# EAGLE board Panel (EAGLE 9.5.2)
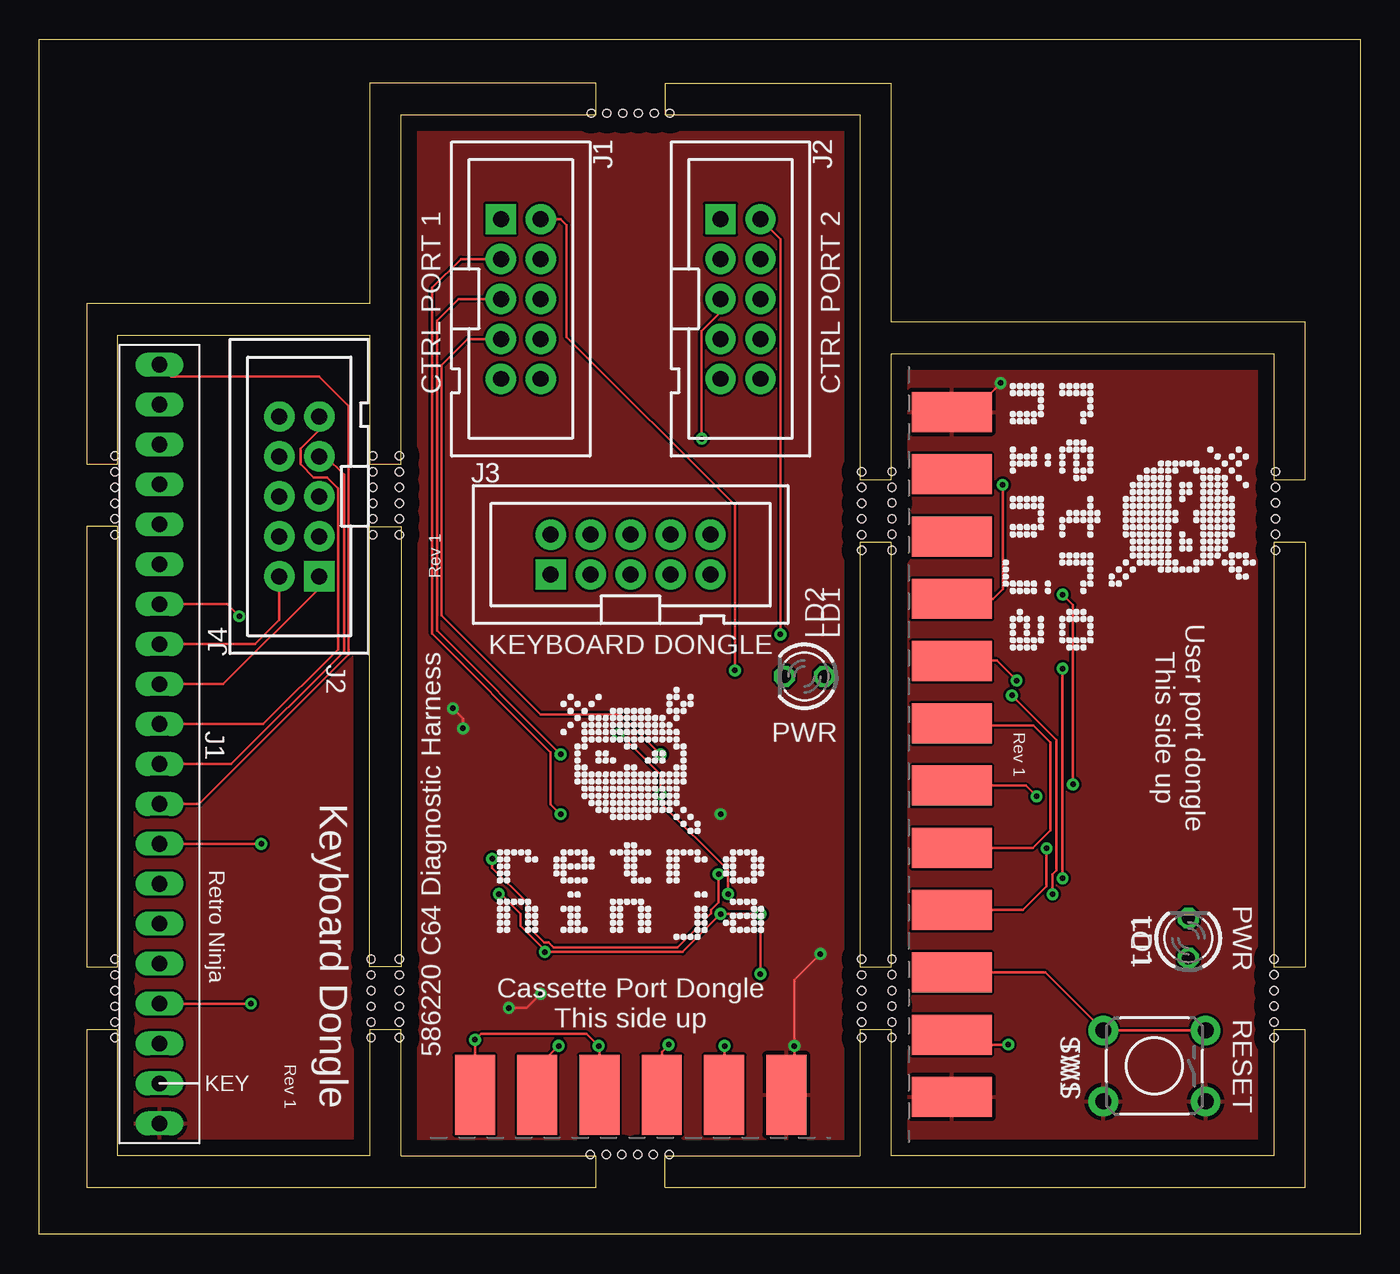
[diagram p0: board, top side]
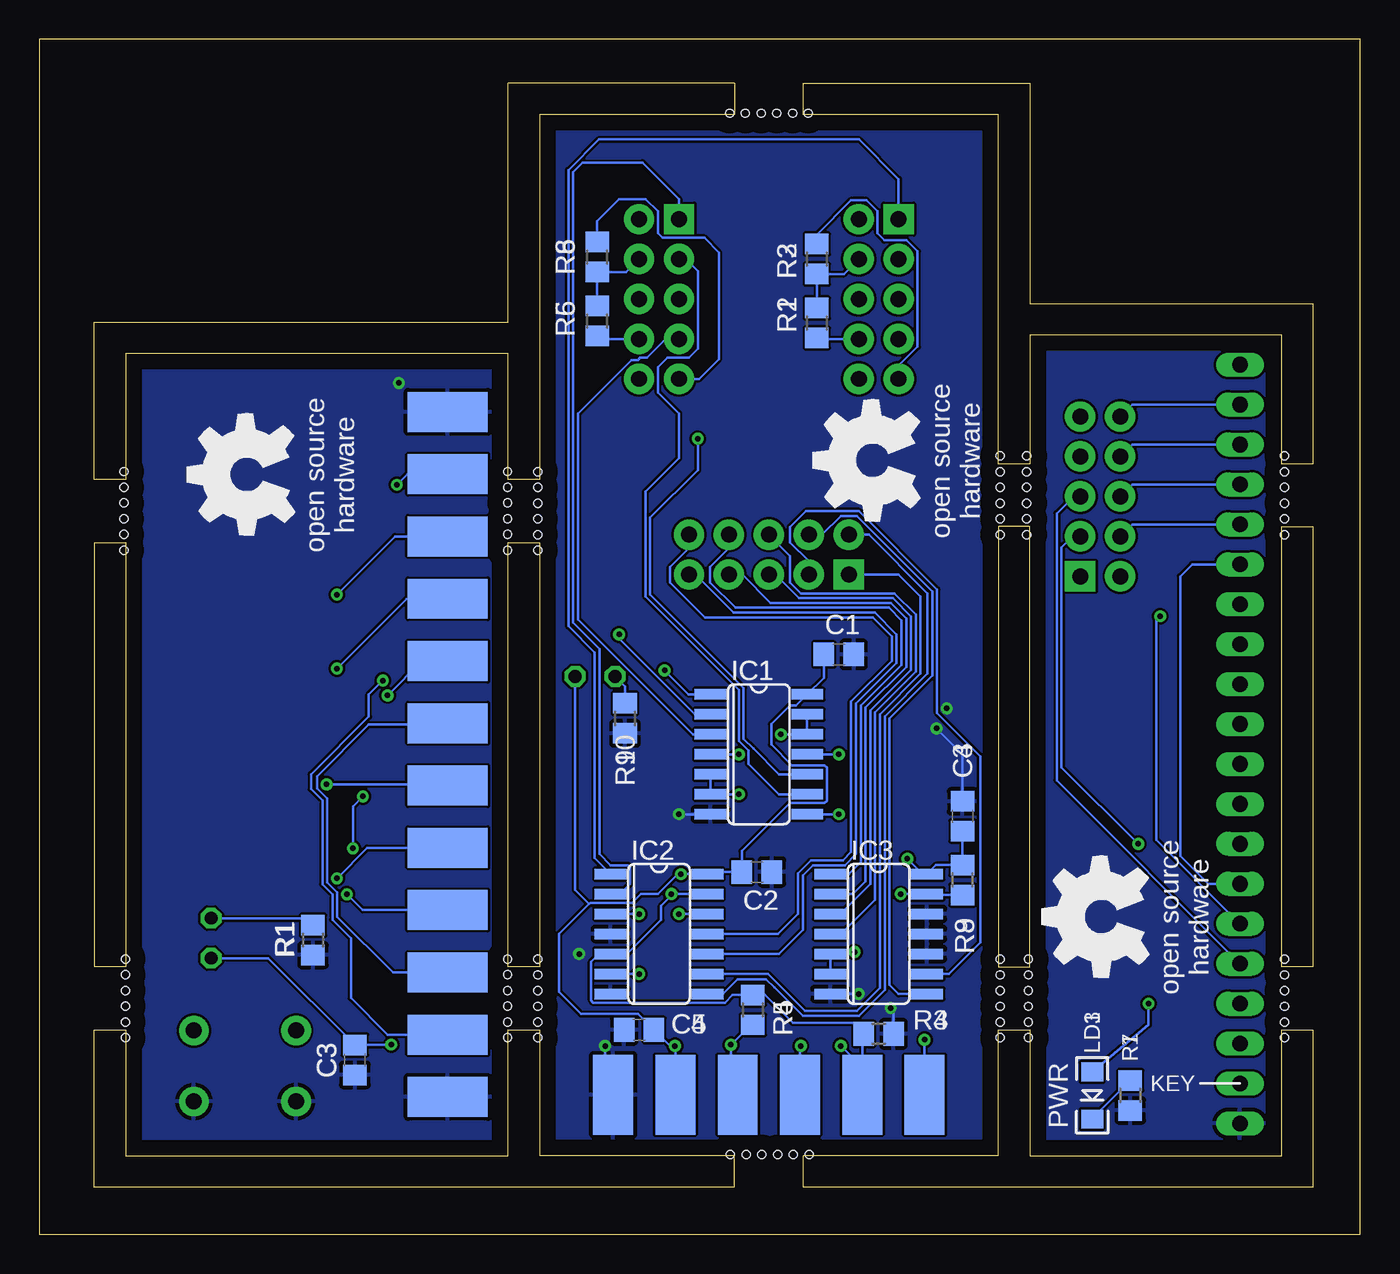
[diagram p1: board, bottom side, seen from below]

Size 84 x 76 mm. Coordinates in mm from the lower left corner, seen from the top.
Outline: 0,0 0,76 84,76 84,0 0,0
Outline: 5,5 5,13 3,13 3,3 35.4,3 35.4,5 23,5 23,13 21,13 21,5 5,5
Outline: 39.8,3 80.5,3 80.5,13 78.5,13 78.5,5 54.2,5 54.2,13 52.2,12.99 52.2,5 39.8,5 39.8,3
Outline: 80.5,44 80.5,17 78.5,17 78.5,44 80.5,44
Outline: 78.5,48 80.5,48 80.5,58.01 54.2,58.01 54.2,73.2 39.8,73.2 39.8,71.2 52.2,71.2 52.2,48 54.2,48 54.2,56 78.5,56 78.5,48
Outline: 52.2,44 52.2,17 54.2,17 54.2,44 52.2,44
Outline: 23,71.2 35.4,71.2 35.4,73.2 21,73.2 21,59.2 3,59.2 3,49 5,49 5,57.2 21,57.2 21,49 23,49 23,71.2
Outline: 21,45 23,45 23,17 21,17 21,45
Outline: 3,17 5,17 5,45 3,45 3,17
Copper layers (1*16): Top 0.035mm / dielectric 0.15mm / Bottom 0.035mm
Design rules "default": minimum track width 6mil, minimum drill 0.35mm, track to track 6mil, track to pad 6mil, pad to pad 6mil, via to via 6mil, smd to smd 6mil, copper to edge 40mil, drill to drill 6mil, minimum pad ring 10mil, minimum via ring 8mil, stop-mask expansion 4mil, vias tented up to drill 0mil, thermal gap 10mil
Holes 0.5 mm at 4.8,47.5 4.8,48.5 4.8,46.5 4.8,45.5 4.8,49.5 4.8,44.5 21.2,47.5 21.2,48.5 21.2,46.5 21.2,45.5 21.2,49.5 21.2,44.5 22.9,47.5 22.9,48.5 22.9,46.5 22.9,45.5 22.9,49.5 22.9,44.5 52.3,46.5 52.3,47.5 52.3,45.5 52.3,44.5 52.3,48.5 52.3,43.5 78.52,14.51 78.52,13.51 78.52,15.51 78.52,16.51 78.52,12.51 78.52,17.51 54.22,14.51 54.22,13.51 54.22,15.51 54.22,16.51 54.22,12.51 54.22,17.51 54.22,45.51 54.22,44.51 54.22,46.51 54.22,47.51 54.22,43.51 54.22,48.51 4.8,15.5 4.8,16.5 4.8,14.5 4.8,13.5 4.8,17.5 4.8,12.5 21.1,15.5 21.1,16.5 21.1,14.5 21.1,13.5 21.1,17.5 21.1,12.5 22.9,15.5 22.9,16.5 22.9,14.5 22.9,13.5 22.9,17.5 22.9,12.5 52.3,15.5 52.3,16.5 52.3,14.5 52.3,13.5 52.3,17.5 52.3,12.5 78.62,45.51 78.62,44.51 78.62,46.51 78.62,47.51 78.62,43.51 78.62,48.51 37.1,71.3 36.1,71.3 38.1,71.3 39.1,71.3 35.1,71.3 40.1,71.3 37.05,5.07 36.05,5.07 38.05,5.07 39.05,5.07 35.05,5.07 40.05,5.07

## Footprints (pad centres in the part's own frame; a part is rotated, then mirrored left to right if it is on the bottom)
C0805 = smd 1.3 x 1.5: 1 -0.95,0; 2 0.95,0
C64_CASSETTE_CONNECTOR = smd 2.54 x 5.08: 1 9.9,2.73; 2 5.94,2.73; 3 1.98,2.73; 4 -1.98,2.73; 5 -5.94,2.73; 6 -9.9,2.73 | smd 2.54 x 5.08 bottom: A 9.9,2.73; B 5.94,2.73; C 1.98,2.73; D -1.98,2.73; E -5.94,2.73; F -9.9,2.73
C64_KEYBOARD_CONNECTOR = drill 1 pad 1.524 long: !RESTORE 0,19.05; +5V 0,16.51; GND 0,24.13; N/C 0,21.59; PA0 0,-6.35; PA1 0,-21.59; PA2 0,-19.05; PA3 0,-16.51; PA4 0,-13.97; PA5 0,-11.43; PA6 0,-8.89; PA7 0,-24.13; PB0 0,-3.81; PB1 0,-1.27; PB2 0,1.27; PB3 0,13.97; PB4 0,6.35; PB5 0,8.89; PB6 0,11.43; PB7 0,3.81
SO14 = smd 0.66 x 2.032: 1 -3.81,-3.073; 2 -2.54,-3.073; 3 -1.27,-3.073; 4 0,-3.073; 5 1.27,-3.073; 6 2.54,-3.073; 7 3.81,-3.073; 8 3.81,3.073; 9 2.54,3.073; 10 1.27,3.073; 11 0,3.073; 12 -1.27,3.073; 13 -2.54,3.073; 14 -3.81,3.073
2X5_HEADER_WALLED = drill 1.016 pad 1.93 square: 1 -5.08,-1.27 | drill 1.016 pad 1.93: 2 -5.08,1.27; 3 -2.54,-1.27; 4 -2.54,1.27; 5 0,-1.27; 6 0,1.27; 7 2.54,-1.27; 8 2.54,1.27; 9 5.08,-1.27; 10 5.08,1.27
LED3MM = drill 0.813 octagon: A -1.27,0; K 1.27,0
LED-1206 = smd 1.2 x 1.4: A -1.5,0; C 1.5,0
R0805 = smd 1.3 x 1.5: 1 -0.95,0; 2 0.95,0
TACTILE-PTH = drill 1.016 pad 1.88: 1 -3.251,2.261; 2 3.251,2.261; 3 -3.251,-2.261; 4 3.251,-2.261
C64_USER_PORT_DEVICE_CONNECTOR = smd 2.54 x 5.08: 1 21.78,2.73; 2 17.82,2.73; 3 13.86,2.73; 4 9.9,2.73; 5 5.94,2.73; 6 1.98,2.73; 7 -1.98,2.73; 8 -5.94,2.73; 9 -9.9,2.73; 10 -13.86,2.73; 11 -17.82,2.73; 12 -21.78,2.73 | smd 2.54 x 5.08 bottom: A 21.78,2.73; B 17.82,2.73; C 13.86,2.73; D 9.9,2.73; E 5.94,2.73; F 1.98,2.73; H -1.98,2.73; J -5.94,2.73; K -9.9,2.73; L -13.86,2.73; M -17.82,2.73; N -21.78,2.73

## Placement (x,y rotation side)
C1  100n  [C0805]  33.16,36.88 0 bottom
C2  100n  [C0805]  38.37,23.04 0 bottom
C3  100n  [C0805]  63.93,11.09 270 bottom
C4  100n  [C0805]  25.29,26.59 90 bottom
C5  100n  [C0805]  45.86,13 0 bottom
CN1  C64_CASSETTE_PORT_CONNECTOR_SIDE  [C64_CASSETTE_CONNECTOR]  37.6,6.15 0 top
CN2  [C64_KEYBOARD_CONNECTOR]  7.64,31.18 180 top
IC1  4066D  [SO14]  38.24,30.53 270 bottom
IC2  4066D  [SO14]  44.59,19.1 270 bottom
IC3  4066D  [SO14]  30.62,19.1 270 bottom
J1  CTRL PORT 1  [2X5_HEADER_WALLED]  30.62,59.49 270 top
J2  CTRL PORT 2  [2X5_HEADER_WALLED]  44.59,59.49 270 top
J3  KEYBOARD DONGLE  [2X5_HEADER_WALLED]  37.6,43.23 0 top
J4  [2X5_HEADER_WALLED]  16.53,46.93 90 top
LD1  [LED3MM]  73.08,18.84 90 top
LD2  [LED3MM]  48.65,35.48 180 top
LD3  [LED-1206]  17.04,8.83 270 bottom
R1  330R  [R0805]  66.6,18.71 90 bottom
R2  120K  [R0805]  34.56,57.96 90 bottom
R3  120K  [R0805]  34.56,62.03 270 bottom
R4  330R  [R0805]  30.62,12.75 180 bottom
R5  150R  [R0805]  38.62,14.27 270 bottom
R6  120k  [R0805]  48.53,58.09 90 bottom
R7  330R  [R0805]  14.62,8.83 90 bottom
R8  120k  [R0805]  48.53,62.15 270 bottom
R9  10k  [R0805]  25.29,22.53 90 bottom
R10  330R  [R0805]  46.75,32.82 90 bottom
SW1  [TACTILE-PTH]  70.92,10.71 180 top
U$1  RETRONINJA_TEXT  [RETRONINJA_TEXT_17MM]  68.12,45.63 270 top
U$3  [OSHW_8MM]  70.79,48.3 90 bottom
U$4  RETRONINJA_TEXT  [RETRONINJA_TEXT_17MM]  37.6,25.58 0 top
U$5  [OSHW_8MM]  31,49.2 90 bottom
U$6  [OSHW_8MM]  16.45,20.18 90 bottom
X1  C64_USER_PORT_CONNECTOR_SIDE  [C64_USER_PORT_DEVICE_CONNECTOR]  55.3,30.52 270 top

## Library data of the parts
C1-C5 = rcl; SPICEPREFIX: C
CN1 CN2 J1-J4 X1 = Per
IC1-IC3 = 40xx
LD1 LD2 = led
LD3 = SparkFun-LED
R1-R10 = rcl; SPICEPREFIX: R
SW1 = SparkFun-Electromechanical
U$1 U$4 = PCBGraphics
U$3 U$5 U$6 = oshw

## Nets
9VAC: X1.10
9VAC2: X1.11
!FLAG2: X1.8 X1.B
!RESET: SW1.3 SW1.4 X1.3
!WRITE: IC2.3 IC2.6 IC2.12 IC3.5 IC3.6 IC3.13 R9.1
+5V: C3.1 LD1.A X1.2
+5V1: CN2.+5V LD3.A
+5V2: C1.1 C2.1 C4.1 C5.2 CN1.2 CN1.B IC1.14 IC2.14 IC3.14 LD2.A R9.2
+5VJOYA: J1.4 R2.2 R3.2
+5VJOYB: J2.4 R6.2 R8.2
CNT1: X1.4 X1.6
FIREA: IC1.1 J1.2
FIREB: IC1.2 J2.2
GND: C3.2 R1.1 SW1.1 SW1.2 X1.1 X1.12 X1.A X1.N
GND1: CN2.GND R7.1
GND2: C1.2 C2.2 C4.2 C5.1 CN1.1 CN1.A IC1.7 IC2.4 IC2.7 IC3.7 IC3.10 IC3.11 IC3.12 R4.1 R10.1
JOYA0: IC2.1 J1.1
JOYA1: IC1.8 J1.3
JOYA2: IC1.11 J1.5
JOYA3: IC1.4 J1.7
JOYB0: IC2.2 J2.1
JOYB1: IC1.9 J2.3
JOYB2: IC1.10 J2.5
JOYB3: IC1.3 J2.7
KBPA0: IC2.8 J3.2
KBPA1: IC2.11 J3.10
KBPA2: IC3.1 J3.8
KBPA3: IC3.4 J3.6
KBPA4: IC3.8 J3.4
KBPB0: IC2.9 J3.1
KBPB1: IC2.10 J3.9
KBPB2: IC3.2 J3.7
KBPB3: IC3.3 J3.5
KBPB4: IC3.9 J3.3
MOTOR: CN1.3 CN1.C R5.2
N$1: LD3.C R7.2
N$2: LD1.K R1.2
N$3: LD2.K R10.2
PA0: CN2.PA0 J4.2
PA1: CN2.PA1 J4.10
PA2: CN2.PA2 J4.8
PA3: CN2.PA3 J4.6
PA4: CN2.PA4 J4.4
PA5: CN2.PA5 CN2.PB5
PA6: CN2.PA6 CN2.PB6
PA7: CN2.PA7 CN2.PB7
PB0: CN2.PB0 J4.1
PB1: CN2.PB1 J4.9
PB2: CN2.PB2 J4.7
PB3: CN2.PB3 J4.5
PB4: CN2.PB4 J4.3
PB5: X1.C X1.H
PB6: X1.D X1.J
PB7: X1.E X1.K
PB8: X1.F X1.L
POTXA: J1.8 R2.1
POTXB: J2.8 R6.1
POTYA: J1.9 R3.1
POTYB: J2.9 R8.1
SENSE: CN1.4 CN1.6 CN1.D CN1.F
SERATN: X1.9 X1.M
SP1: X1.5 X1.7
WRITE: CN1.5 CN1.E IC1.5 IC1.6 IC1.12 IC1.13 IC2.5 IC2.13 R4.2 R5.1

## Tracks (layer width: path | path; a pad name or v marks a point on that pad's centre or on a via)
!FLAG2  (via drill 0.35)
  Top 0.152: v62.15,35.22 60.88,36.49 58.05,36.49 X1.8
  Bottom 0.152: X1.B 61.86,12.7 64.19,15.03 64.19,18.84 65.35,20 65.35,21.63 65.99,22.27 65.99,27.58 66.73,28.32 66.73,29.25 63.04,32.93 63.04,34.33 v62.15,35.22
!RESET
  Top 0.152: X1.3 63.97,16.66 SW1.4 SW1.3
!WRITE  (via drill 0.35)
  Top 0.152: v29.22,21.64 29.35,21.64 30.62,20.37 30.62,19.61 32.14,18.08 v32.14,17.96 40.91,17.96 v43.32,20.37 v45.86,20.37 v45.86,16.56
  Bottom 0.152: IC3.6 IC3.5 33.57,17.96 v32.14,17.96 | IC2.3 v45.86,20.37 | v43.32,20.37 IC2.12 | v29.22,21.64 IC3.13 27.49,21.58 R9.1 | IC2.6 v45.86,16.56
+5V  (via drill 0.35)
  Top 0.152: v61.62,12.06 58.66,12.06 X1.2
  Bottom 0.152: LD1.A 69.46,17.57 C3.1 63.91,12.06 v61.62,12.06
+5V1  (via drill 0.35)
  Top 0.152: v13.46,14.67 CN2.+5V
  Bottom 0.152: LD3.A 13.46,13.32 v13.46,14.67
+5V2  (via drill 0.35)
  Top 0.152: v43.57,11.99 43.57,8.9 CN1.B | v43.19,22.91 43.19,21.1 42.71,20.62 42.71,20.4 40.58,18.26 32.7,18.26 32.4,18.56 32.09,18.56 30.97,19.69 30.97,21.13 28.8,23.3 v28.8,23.88
  Bottom 0.152: CN1.B 43.55,11.96 v43.57,11.99 43.89,11.99 C5.2 45.93,14.02 49.55,14.02 50.94,15.41 50.94,19.1 49.03,21 | v28.8,23.88 27.83,22.91 IC3.14 26.98,23.48 R9.2 C4.1 | C1.1 34.11,35.4 IC1.14 35.88,33.63 36.28,33.63 37.45,32.46 37.45,31.14 36.12,29.82 34.06,29.82 33.92,29.68 33.92,27.57 34.06,27.43 36.26,27.43 39.32,24.37 C2.1 41.39,23.04 IC2.14 v43.19,22.91 43.39,22.91 44.66,21.64 45.74,21.64 46.3,21.08 48.96,21.08 49.03,21 | LD2.A 49.92,21.89 49.03,21
+5VJOYA
  Bottom 0.152: J1.4 32.84,61.08 R3.2 R2.2
+5VJOYB
  Bottom 0.152: R6.2 R8.2 46.68,61.2 J2.4
CNT1  (via drill 0.35)
  Top 0.152: X1.6 62.74,28.54 v63.42,27.85 | v64.06,24.55 64.06,22.14 62.54,20.62 X1.4
  Bottom 0.152: v64.06,24.55 64.06,27.22 v63.42,27.85
FIREA  (via drill 0.35)
  Top 0.152: v44.24,35.86 44.24,46.38 33.54,57.07 33.54,64.19 33.16,64.57 J1.2
  Bottom 0.152: v44.24,35.86 42.71,34.34 IC1.1
FIREB  (via drill 0.35)
  Top 0.152: J2.2 47.13,63.3 v47.13,38.15
  Bottom 0.152: v47.13,38.15 47.13,37.9 42.3,33.07 IC1.2
GND  (via drill 0.35)
  Top 0.152: X1.N 59.3,52.3 v61.14,54.14
  pour Bottom: 54.28,55.92 78.41,55.92 78.41,5.12 54.28,5.12
  pour Top: 54.28,55.92 78.41,55.92 78.41,5.12 54.28,5.12
GND1
  pour Top: 5.1,57.09 20.98,57.09 20.98,5.02 5.1,5.02
  pour Bottom: 5.1,57.09 20.98,57.09 20.98,5.02 5.1,5.02
GND2  (via drill 0.35)
  Top 0.152: CN1.A 48.02,9.39 v48.02,11.99 48.02,16.18 v49.67,17.83 | v31.89,15.29 31,14.4 v29.86,14.4 | v26.94,32.18 26.94,32.81 v26.3,33.45
  Bottom 0.152: v48.02,11.99 48.02,9.39 CN1.A | IC3.7 v31.89,15.29 | v29.86,14.4 29.67,14.21 R4.1 | C4.2 25.29,30.53 v26.94,32.18 | IC1.7 v43.32,26.72
  pour Bottom: 23,5.13 23,71.17 52.21,71.17 52.21,5.13
  pour Top: 23,5.13 23,71.17 52.21,71.17 52.21,5.13
JOYA0
  Bottom 0.152: IC2.1 48.68,23.93 48.68,37.01 50.36,38.68 50.36,67.69 48.4,69.65 31.89,69.65 29.35,67.11 J1.1
JOYA1  (via drill 0.35)
  Top 0.152: J1.3 26.81,62.03 24.98,60.2 24.98,38.2 32.52,30.66 32.52,27.36 v33.16,26.72
  Bottom 0.152: IC1.8 v33.16,26.72
JOYA2  (via drill 0.35)
  Top 0.152: v33.16,30.53 25.29,38.4 25.29,58.1 26.67,59.49 J1.5
  Bottom 0.152: IC1.11 v33.16,30.53
JOYA3  (via drill 0.35)
  Top 0.152: v39.51,30.53 36.97,33.07 31.89,33.07 25.59,39.37 25.59,55.3 27.24,56.95 J1.7
  Bottom 0.152: IC1.4 v39.51,30.53
JOYB0
  Bottom 0.152: J2.1 43.32,65.84 45.64,68.16 49.45,68.16 50.05,67.56 50.05,38.91 48.38,37.24 48.38,24.18 47.66,23.47 46.55,23.47 46.42,23.34 46.42,22.28 47.06,21.64 IC2.2
JOYB1
  Bottom 0.152: IC1.9 36.97,27.99 38.9,29.92 38.9,30.78 39.51,31.39 39.51,34.63 45.45,40.58 45.45,47.23 43.32,49.36 43.32,52.21 44.64,53.53 44.64,55.15 44.04,55.75 42.7,55.75 42.13,56.33 42.13,61.25 42.9,62.03 J2.3
JOYB2  (via drill 0.35)
  Top 0.152: J2.5 43.32,58.63 42.13,57.44 v42.13,50.6
  Bottom 0.152: IC1.10 36.97,29.26 38.6,30.89 38.6,30.91 39.2,31.51 39.2,34.76 45.15,40.7 45.15,45.58 42.13,48.6 v42.13,50.6
JOYB3
  Bottom 0.152: IC1.3 42.43,31.8 49.75,39.12 49.75,52.21 46.35,55.6 45.94,55.6 45.78,55.75 45.37,55.75 44.17,56.95 J2.7
KBPA0
  Bottom 0.152: IC2.8 40.53,15.29 39.59,16.23 37.78,16.23 37.26,15.71 35.45,13.89 31.89,13.89 30.24,15.54 30.24,32.94 27.52,35.65 27.52,40.77 31.25,44.5 J3.2
KBPA1
  Bottom 0.152: J3.10 42.69,43.65 43.88,42.45 43.88,41.47 41.66,39.24 31,39.24 29.78,38.02 29.78,36.47 32.37,33.88 32.37,24.31 32.91,23.77 34.93,23.77 35.75,22.95 35.75,20.37 37.02,19.1 IC2.11
KBPA2
  Bottom 0.152: IC3.1 32.52,22.91 31.76,23.67 31.76,33.63 29.17,36.22 29.17,39.04 29.98,39.85 39.73,39.85 41.34,41.47 41.34,42.45 40.15,43.65 J3.8
KBPA3
  Bottom 0.152: IC3.4 33.01,19.1 30.85,21.26 30.85,33.19 28.26,35.78 28.26,39.42 29.6,40.77 35.56,40.77 36.26,41.47 36.26,43.15 J3.6
KBPA4
  Bottom 0.152: IC3.8 29.35,15.29 29.93,15.87 29.93,32.81 27.22,35.53 27.22,40.89 32.02,45.69 33.02,45.69 34.21,44.5 J3.4
KBPB0
  Bottom 0.152: J3.1 29.35,41.96 27.95,40.56 27.95,35.65 30.54,33.06 30.54,15.67 32.02,14.2 35.31,14.2 37.68,16.56 IC2.9
KBPB1
  Bottom 0.152: IC2.10 36.97,17.83 35.45,19.35 35.45,22.83 34.8,23.47 32.78,23.47 32.07,24.18 32.07,33.75 29.48,36.34 29.48,38.15 30.87,39.55 39.85,39.55 42.26,41.96 J3.9
KBPB2
  Bottom 0.152: IC3.2 32.27,21.64 31.46,22.45 31.46,33.5 28.87,36.09 28.87,39.17 29.86,40.16 37.49,40.16 39.29,41.96 J3.7
KBPB3
  Bottom 0.152: IC3.3 33.06,20.37 31.15,22.27 31.15,33.31 28.56,35.91 28.56,39.29 29.73,40.46 35.69,40.46 37.18,41.96 J3.5
KBPB4
  Bottom 0.152: J3.3 35.06,42.81 36.26,44.01 36.26,44.99 35.26,46 31.89,46 26.91,41.02 26.91,33.17 24.14,30.4 24.14,18.56 26.15,16.56 IC3.9
MOTOR  (via drill 0.35)
  Top 0.152: v40.02,12.05 39.59,11.62 CN1.C
  Bottom 0.152: R5.2 38.75,13.32 v40.02,12.05 40.02,9.31 CN1.C
N$1
  Bottom 0.152: R7.2 17.04,7.37 LD3.C
N$2
  Bottom 0.152: R1.2 67.05,20.11 LD1.K
N$3
  Bottom 0.152: LD2.K 46.75,34.85 R10.2
PA0
  Top 0.152: J4.2 15.26,39.06 13.74,37.53 CN2.PA0
PA1
  Bottom 0.152: CN2.PA1 14.5,52.77 J4.10
PA2
  Bottom 0.152: CN2.PA2 14.5,50.23 J4.8
PA3
  Bottom 0.152: CN2.PA3 14.5,47.69 J4.6
PA4
  Bottom 0.152: CN2.PA4 14.5,45.15 J4.4
PA5
  Bottom 0.152: CN2.PA5 10.69,42.61 11.45,41.85 11.45,24.07 9.67,22.29 CN2.PB5
PA6  (via drill 0.35)
  Top 0.152: v12.72,39.31 11.96,40.07 CN2.PA6
  Bottom 0.152: CN2.PB6 12.97,25.09 12.97,39.06 v12.72,39.31
PA7
  Top 0.152: CN2.PA7 8.4,54.55 17.8,54.55 19.68,52.67 19.68,36.87 10.18,27.37 CN2.PB7
PB0
  Top 0.152: J4.1 17.8,41.09 11.7,34.99 CN2.PB0
PB1
  Top 0.152: J4.9 17.8,51.16 16.61,49.96 16.61,48.98 17.46,48.12 18.29,48.12 18.99,47.42 18.99,37.2 14.24,32.45 CN2.PB1
PB2
  Top 0.152: J4.7 18.22,49.47 19.38,48.31 19.38,37.08 12.21,29.91 CN2.PB2
PB3
  Bottom 0.152: J4.5 18.22,46.93 19.3,45.85 19.3,28.87 CN2.PB3
PB4  (via drill 0.35)
  Top 0.152: v14.12,24.83 CN2.PB4
  Bottom 0.152: J4.3 18.28,44.39 18.99,43.67 18.99,29.71 v14.12,24.83
PB5
  Bottom 0.152: X1.C 61.5,16.66 65.05,20.2 65.05,21.76 65.68,22.39 65.68,27.71 66.34,28.37 66.34,29.12 63.04,32.42 59.37,32.42 X1.H
PB6  (via drill 0.35)
  Top 0.152: v64.44,21.63 64.44,22.9 64.69,23.15 64.69,31.44 v61.85,34.28
  Bottom 0.152: X1.D 63.43,20.62 v64.44,21.63 | v61.85,34.28 59.67,36.46 X1.J
PB7  (via drill 0.35)
  Top 0.152: v65.08,22.65 v65.08,35.98
  Bottom 0.152: X1.E 63.14,24.58 v65.08,22.65 | v65.08,35.98 60.64,40.42 X1.K
PB8  (via drill 0.35)
  Top 0.152: v65.73,28.61 65.73,40.02 v65.08,40.68
  Bottom 0.152: X1.F 59.37,28.61 v65.73,28.61 | X1.L 61.38,44.38 v65.08,40.68
POTXA
  Bottom 0.152: R2.1 34.49,56.95 J1.8
POTXB
  Bottom 0.152: R6.1 48.33,56.95 J2.8
POTYA
  Bottom 0.152: J1.9 29.35,55.26 28.16,56.45 28.16,62.52 28.86,63.22 30.26,63.22 30.7,63.66 30.7,65.06 31.4,65.76 32.38,65.76 34.56,63.59 R3.1
POTYB
  Bottom 0.152: J2.9 42.05,54.41 40.78,55.68 40.78,62.44 41.71,63.37 44.38,63.37 44.67,63.66 44.67,65.06 45.44,65.84 47.13,65.84 48.53,64.44 R8.1
SENSE  (via drill 0.35)
  Top 0.152: CN1.D 35.62,11.94 v35.57,11.99 34.81,12.75 28.08,12.75 v27.7,12.38 CN1.F
  Bottom 0.152: CN1.D 35.62,11.94 v35.57,11.99 | CN1.F v27.7,12.38
SERATN  (via drill 0.35)
  Top 0.152: v61.27,47.66 61.27,41.05 60.63,40.42 X1.9
  Bottom 0.152: X1.M 60.59,48.34 v61.27,47.66
SP1
  Top 0.152: X1.5 63.2,24.58 64.31,25.69 64.31,31.28 63.22,32.37 59.42,32.37 X1.7
WRITE  (via drill 0.35)
  Top 0.152: v33.03,11.99 31.66,10.62 CN1.E | v43.8,21.64 43.8,23.16 39.51,27.45 v39.51,27.99 39.51,29.26 36.97,31.8 v36.84,31.8
  Bottom 0.152: CN1.E 31.66,10.62 | 31.66,10.62 v33.03,11.99 | 31.66,10.62 31.66,12.65 R4.2 32.28,13.46 36.07,13.46 37.84,15.22 R5.1 39.91,15.22 40.41,14.73 48.77,14.73 48.91,14.87 48.91,17.32 48.4,17.83 IC2.5 46.62,17.83 44.46,19.99 44.46,20.88 43.7,21.64 | 43.7,21.64 IC2.13 | IC1.5 IC1.6 v39.51,27.99 | IC1.13 IC1.12 v36.84,31.8 | 43.7,21.64 v43.8,21.64

## Text on the board
tPlace: Rev 1 | PWR | Rev 1 | User port dongle / This side up | PWR | Retro Ninja | Cassette Port Dongle / This side up | 586220 C64 Diagnostic Harness | RESET | KEY | Rev 1 | Keyboard Dongle
bPlace: KEY | PWR
_tNames: J1 | J2 | J3 | LD1 | J2 | J1 | LD1 | SW1
_bNames: R2 | R6 | R1 | R5 | C1 | IC1 | C3 | R9 | IC3 | IC2 | C2 | R8 | R1 | R4 | R3 | C4 | R1 | LD1 | C3